# Altium PCB PCB.PcbDoc
Units mm, origin at the board's own origin, x right, y up, seen from the top; angles counter-clockwise.
Board outline 63.5 x 38.1 mm, 2 copper layers (Top Layer, Bottom Layer); 30 components, 23 nets, 90 pads, 23 vias.
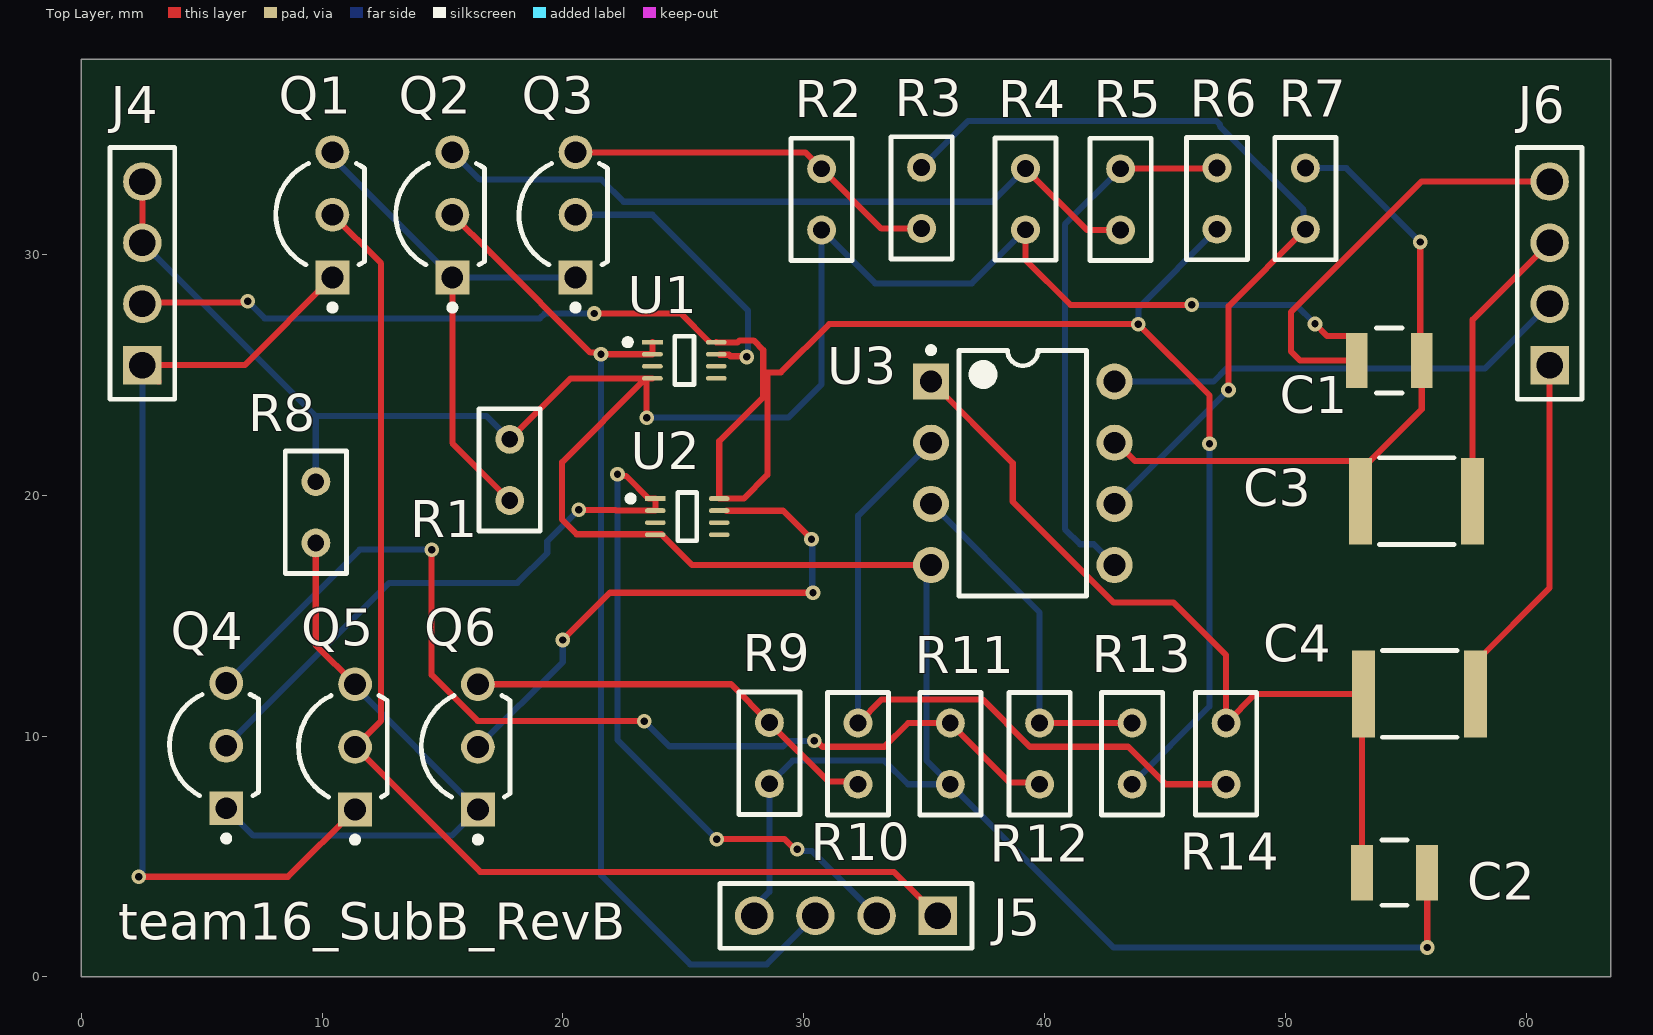
[diagram p0: Top Layer view]
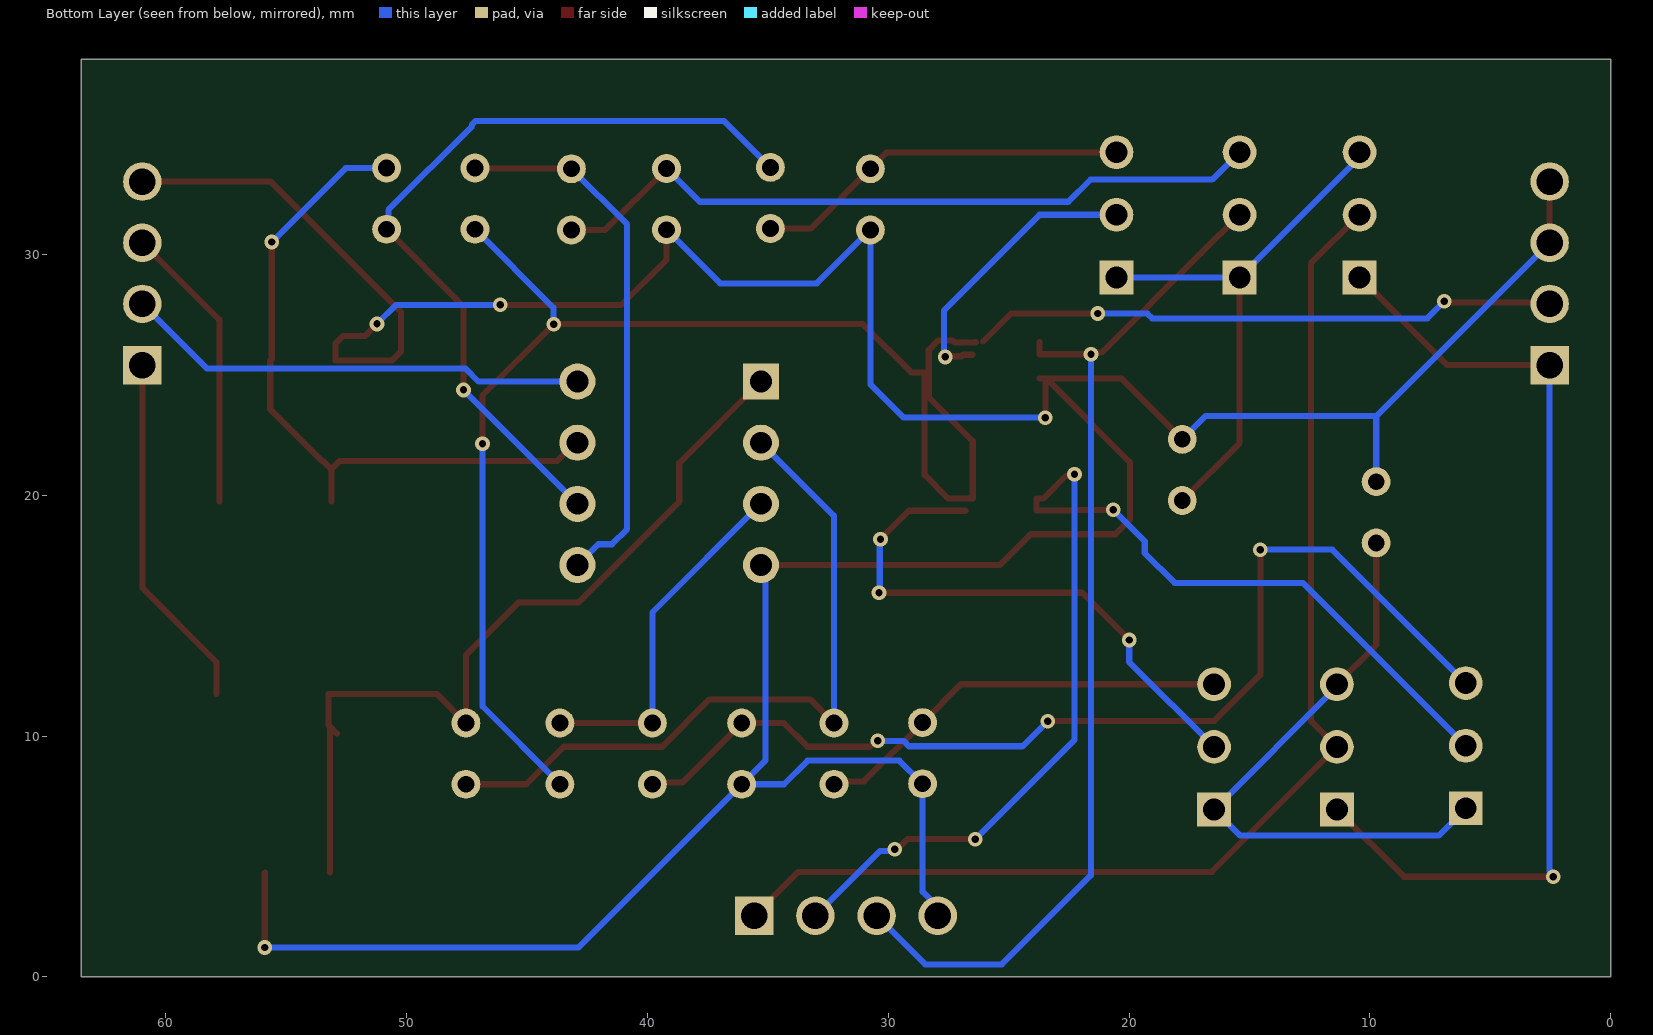
[diagram p1: Bottom Layer view, seen from below]
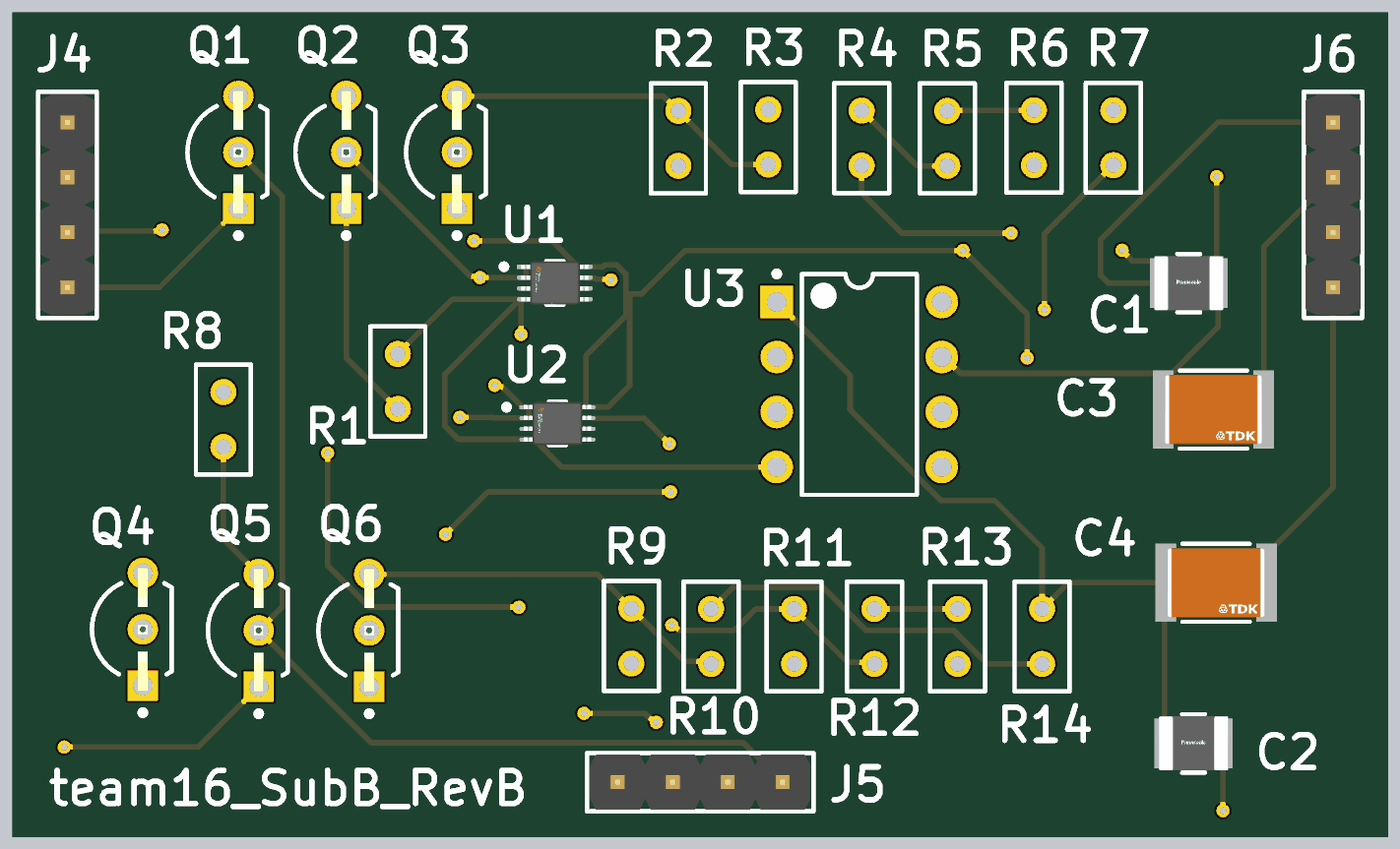
[diagram p2: 3D render of the assembled board from above, using the file's embedded part models]

## Layer stack, top to bottom
Top Solder: solder mask 0.0102, Solder Resist, Dk 3.5
Top Layer: signal copper 0.0356
Dielectric 1: dielectric 0.32, FR-4, Dk 4.8
Bottom Layer: signal copper 0.0356
Bottom Solder: solder mask 0.0102, Solder Resist, Dk 3.5

## Board outline
0,0 0,38.1 63.5,38.1 63.5,0

## Design rules (kind name [scope] priority, off if disabled: settings)
Clearance [All] p1: gap=0.254 ignorepadtopadclearanceinfootprint=FALSE except(0: Arc-Hole Track-Hole SMDPad-Hole THPad-Hole Via-Hole Fill-Hole Poly-Hole Region-Hole Text-Hole)
HoleSize [All] p1: absolutevalues=TRUE maxlimit=22.86 minlimit=0.305 maxpercent=80.000 minpercent=20.000
MinimumSolderMaskSliver [All] p1: minsoldermaskwidth=0.025
PolygonConnect [All] p1: connectstyle=Relief reliefconductorwidth=0.254 reliefentries=4 polygonreliefangle="90 Angle" airgapwidth=0.254
RoutingVias [All] p1: holewidth=0.305 width=0.61 viastyle="Through Hole" minholewidth=0.305 minwidth=0.61 maxholewidth=2.54 maxwidth=5.08
SilkToSilkClearance [All] p1: silktosilkclearance=0
SilkToSolderMaskClearance [IsPad] p1: minsilkscreentomaskgap=0.025 clearancetoexposedcopper=TRUE
SolderMaskExpansion [All] p1: expansion=0.102 istentingtop=FALSE
Width [All] p1: maxlimit=5.08 minlimit=0.254 preferedwidth=0.254
26 further rules are at their usual default settings.

## Components (designator, comment, footprint, x,y, rotation, side; value= is the part's Value field where it differs from the comment)
C1 "ECHU1C104GX5" FP-ECHUG3-MFG 54.3,25.59 r0 top
C2 "ECHU1C104GX5" FP-ECHUG3-MFG 54.52,4.33 r0 top
C3 "C4532X7R1C685K200KM" FP-C4532-200-0_4-IPC_B 55.44,19.75 r0 top
C4 "C4532X7R1C685K200KM" FP-C4532-200-0_4-IPC_B 55.56,11.75 r0 top
J4 "IF" 61300411121 2.54,29.21 r90 top
J5 "LO" 61300411121 31.75,2.54 r180 top
J6 "OUT" 61300411121 60.96,29.21 r90 top
Q1 "BS170ZL1G" ONSC-TO-92-3-29-11_AM_BL 10.43,31.64 r90 top
Q2 "BS170ZL1G" ONSC-TO-92-3-29-11_AM_BL 15.41,31.64 r90 top
Q3 "BS170ZL1G" ONSC-TO-92-3-29-11_AM_BL 20.52,31.64 r90 top
Q4 "BS170ZL1G" ONSC-TO-92-3-29-11_AM_BL 6.02,9.6 r90 top
Q5 "BS170ZL1G" ONSC-TO-92-3-29-11_AM_BL 11.37,9.55 r90 top
Q6 "BS170ZL1G" ONSC-TO-92-3-29-11_AM_BL 16.47,9.55 r90 top
R1 "Res1" RAD-0.1 17.79,21.05 r90 top value=100
R2 "Res1" RAD-0.1 30.74,32.28 r90 top value=1
R3 "Res1" RAD-0.1 34.89,32.34 r90 top value=100
R4 "Res1" RAD-0.1 39.2,32.29 r90 top value=1
R5 "Res1" RAD-0.1 43.15,32.28 r90 top value=100
R6 "Res1" RAD-0.1 47.15,32.31 r90 top value=6800
R7 "Res1" RAD-0.1 50.82,32.31 r90 top value=6800
R8 "Res1" RAD-0.1 9.74,19.29 r90 top value=100
R9 "Res1" RAD-0.1 28.57,9.29 r90 top value=1
R10 "Res1" RAD-0.1 32.25,9.27 r90 top value=100
R11 "Res1" RAD-0.1 36.08,9.27 r90 top value=1
R12 "Res1" RAD-0.1 39.79,9.27 r90 top value=100
R13 "Res1" RAD-0.1 43.63,9.27 r90 top value=6800
R14 "Res1" RAD-0.1 47.53,9.27 r90 top value=6800
U1 "SN74LVC2G00DCUR" FP-DCU0008A-IPC_C 25.04,25.6 r0 top
U2 "SN74LVC2G00DCUR" FP-DCU0008A-IPC_C 25.16,19.11 r0 top
U3 "TLV2462CP" P0008A 39.09,20.91 r0 top

## Footprints (in the part's own frame and the unit in brackets; to place one, negate y for a bottom-side part, rotate by r counter-clockwise, add the part's x,y. Pads: shape width x height; smd on the part's side, far side on the other; paste and mask are expansions set on the pad)
61300411121 [mm] "Pin Header, pitch 2.54 mm, THT, Vertical, single row, 4p"
  rect 1.6x1.6 hole 1.1: 1(-3.81,0)
  round 1.6 hole 1.1: 2(-1.27,0) 3(1.27,0) 4(3.81,0)
  silkscreen extent -5.23,-1.35 5.23,1.35, body extent -5.08,-1.27 5.08,1.27, height 8.57
FP-C4532-200-0_4-IPC_B [mm]
  rect 0.953x3.603 smd paste+0 mask+0: 1(-2.325,0) 2(2.325,0)
  silkscreen extent -1.55,-1.8 1.55,1.8, body extent -3.05,-2.05 3.05,2.05, height 0.25
FP-DCU0008A-IPC_C [mm]
  rect 0.86x0.197 smd paste+0 mask+0: 1(-1.326,0.75)
  rrect100% 0.86x0.197 smd paste+0 mask+0: 2(-1.326,0.25) 3(-1.326,-0.25) 4(-1.326,-0.75) 5(1.326,-0.75) 6(1.326,-0.25) 7(1.326,0.25) 8(1.326,0.75)
  silkscreen extent -2.47,-1 0.4,1, body extent -1.86,-1.1 1.86,1.1, height 0.25
FP-ECHUG3-MFG [mm]
  rect 0.9x2.3 smd paste+0 mask+0: 1(-1.35,0) 2(1.35,0)
  silkscreen extent -0.53,-1.35 0.53,1.35, body extent -1.9,-1.45 1.9,1.45, height 0.25
ONSC-TO-92-3-29-11_AM_BL [mm] "TO, 3-Leads, Body Dia 4.7mm, Pitch 2.6mm"
  rect 1.4x1.4 hole 0.9: 1(-2.6,0)
  round 1.4 hole 0.9: 2(0,0) 3(2.6,0)
  silkscreen extent -3.97,-1.34 2.13,2.35, body extent -2.84,-1.34 2.84,2.35, height 5.33
P0008A [mm] "DIP, 8-Leads, Body 10.15x6.6mm, Pitch 2.54mm"
  rect 1.5x1.5 hole 0.9: 1(-3.81,3.81)
  round 1.5 hole 0.9: 2(-3.81,1.27) 3(-3.81,-1.27) 4(-3.81,-3.81) 5(3.81,-3.81) 6(3.81,-1.27) 7(3.81,1.27) 8(3.81,3.81)
  silkscreen extent -3.93,-5.1 2.65,5.23, body extent -3.95,-5.07 3.95,5.07, height 5.08
RAD-0.1 [mm] "Radial Cap, Thru-Hole; 2 Leads; 0.1 in Pin Spacing"
  round 1.2 hole 0.7: 1(-1.27,0) 2(1.27,0)
  silkscreen extent -2.54,-1.27 2.54,1.27

## Part data
C1 C2: library part CMP-05434-000004-1, "CAP FILM 0.1UF 2% 16VDC 1210", Capacitance=100nF, Case Code (Imperial)=1210, Case Code (Metric)=3225, Dielectric=PPS, Dielectric Material=Polyphenylene, Insulation Resistance=3GR, Max Operating Temperature=125°C, Min Operating Temperature=-55°C, Package Quantity=1, Tolerance=2%, Voltage=16V, Case/Package=1210, Construction=Flat, Contact Plating=Copper, Depth=2.5mm, Dissipation Factor=0.6%, Height=2.1mm, Height - Seated (Max)=0.091inch, Lead Free="Lead Free", Length=3.2mm, Life (Hours)=500Hour, Mount="Surface Mount", Number of Pins=2, Packaging="Tape and Reel", Radiation Hardening=No, REACH SVHC="No SVHC", RoHS Compliant=Yes, Series=ECHU(X), Termination=SMD/SMT, Voltage Rating=16V, Voltage Rating (DC)=16V, Width=2.5mm
C3 C4: library part CMP-08246-005601-1, "Multilayer Ceramic Capacitors 6.8uF ±10% 16V X7R SMD 1812", Capacitance=6.8uF, Case Code (Imperial)=1812, Case Code (Metric)=4532, Dielectric=X7R, Max Operating Temperature=125°C, Min Operating Temperature=-55°C, Package Quantity=1000, Resistor Type=Ceramic, Tolerance=10%, Voltage Rating=16V, Case/Package=1812, Depth=3.2mm, Height=2mm, Lead Free="Lead Free", Length=0.177inch, Mount="Surface Mount", Number of Pins=2, Packaging="Tape and Reel", RoHS Compliant=Yes, Series=C, Termination=SMD/SMT, Thickness=0.087inch, Voltage Rating (DC)=16V, Weight=0.000952oz, Width=0.126inch
J4 J5 J6: library part CMP-1502-01064-1, "THT Vertical Pin Header WR-PHD, Pitch 2.54 mm, Single Row, 4 pins", Contact Resistance=20mOhm, Manufacturer="Wurth Elektronik", Operating Temperature=-40to105degC, Package Reference=61300411121, Rated Current=3A, Withstanding Voltage=500VAC, Working Voltage=250VAC, Datasheet URL=https://katalog.we-online.de/em/datasheet/6130xx11121.pdf, Gender=Male, Manufacturer URL=http://www.we-online.de, Mounting Technology=THT, Orientation=Vertical, Packaging=Bag, Part Number=61300411121, Pin Number=4, Pitch=2.54mm, Publisher=WurthElektronik, Row Number=Single
Q1 Q2 Q3 Q4 Q5 Q6: library part CMP-1058-00939-1, "Small Signal MOSFET, 500 mA, 60 V, N-Channel, 3-Pin TO-92, Pb-Free, Tape and Reel", Manufacturer="On Semiconductor", Package Type=TO-92, Channel Polarity="N Channel", ComponentLink1Description="Manufacturer URL", ComponentLink1URL=http://www.onsemi.com/, ComponentLink2Description=Datasheet, ComponentLink2URL=http://www.onsemi.com/pub_link/Collateral/BS170-D.PDF, ComponentLink3Description="Package Specification", ComponentLink3URL=http://www.onsemi.com/pub_link/Collateral/MAC97-D.PDF, Configuration=Single, DatasheetVersion="Rev. 6", ID Max (A)=0.5, Mounting Technology="Through Hole", PackageDescription="3-Pin Transistor Outline, Body 4.825 x 3.685 mm, Pitch 1.27 mm", PackageReference=TO-92-3-29-11_AM_BL, PackageVersion="Rev. AM", Packing="Tape and Reel", PartNumber=BS170ZL1G, PD Max (W)=0.35, RoHS=Pb-Free, V(BR)DSS Min (V)=60, VGS Max (V)=20, VGS(th) Max (V)=3
R1 R2 R3 R4 R5 R6 R7 R8 R9 R10 R11 R12 R13 R14: "Resistor", LatestRevisionDate=17-Jul-2002, LatestRevisionNote="Re-released for DXP Platform.", PackageDescription="Axial Device, Thru-Hole; 2 Leads; 0.3 in Pin Spacing", PackageReference=AXIAL-0.3, Published=8-Jun-2000, Publisher="Altium Limited"
U1 U2: library part CMP-0859-00705-4, "IC GATE NAND 2CH 2-INP US8", Case/Package=VSSOP, High Level Output Current=-32mA, Low Level Output Current=32mA, Max Operating Temperature=125°C, Max Supply Voltage=5.5V, Min Operating Temperature=-40°C, Min Supply Voltage=1.65V, Package Quantity=1, Quiescent Current=10uA, Contact Plating=Gold, Lead Free="Lead Free", Logic Function="NAND GATE", Max Output Current=32mA, Mount="Surface Mount", Number of Bits=2, Number of Circuits=2, Number of Elements=2, Number of Gates=2, Number of Input Lines=2, Number of Inputs=2, Number of Output Lines=1, Number of Outputs=1, Number of Pins=8, Output Current=32mA, Packaging="Tape and Reel", Propagation Delay=3.3ns, Radiation Hardening=No, REACH SVHC="No SVHC", RoHS Compliant=Yes, Termination=SMD/SMT, Turn-On Delay Time=3.3ns, Weight=0.000339oz
U3: library part CMP-0272-01601-3, "Dual Low-Power, Rail-to-Rail Input / Output Operational Amplifier, 2.7 to 6 V, 0 to 70 degC, 8-pin DIP (P8), Pb-Free (RoHS)", Manufacturer="Texas Instruments", Total Supply Voltage(Max)(+5V is 5, +/-5V is 10)=6, Total Supply Voltage(Min)(+5V is 5, +/-5V is 10)=2.7, CMRR(Min)(dB)=66, Code_JEDEC=MS-001, ComponentLink1Description="Manufacturer URL", ComponentLink1URL=http://www.ti.com/, ComponentLink2Description=Datasheet, ComponentLink2URL=http://www.ti.com/general/docs/lit/getliterature.tsp?genericPartNumber=TLV2462&fileType=pdf, ComponentLink3Description="Package Specification", ComponentLink3URL=http://www.ti.com/litv/pdf/mpdi001b, DatasheetVersion=SLOS220J, Eco-Plan="Pb-Free (RoHS)", IIB(Max)(pA)=14000, Iq per channel(Max)(mA)=0.575, Mounting Technology="Through Hole", Number of Channels=2, Offset Drift(Typ)(uV/C)=2, PackageDescription="8-Pin Plastic In-Line, Body 9.59 x 6.35 mm, Pitch 2.54 mm", PackageReference=P0008A, PackageVersion="4040082/E, 04/2010", PartNumber=TLV2462CP, Slew Rate(Typ)(V/us)=1.6, Sub Family="High Output Current Amplifier (>=50mA), Low Supply Voltage Amplifier (<=2.7V), Precision Amplifier", Vio (25C)(Max)(mV)=2, Vn at 1kHz(Typ)(nV/rtHz)=11

## Via types
v1: diameter 0.61, hole 0.305, Top Layer to Bottom Layer, 23 vias

## Nets (pads, with @x,y where several pads share a name; then routed paths per layer and width w, separated by ;. In a path a pad name is that pad's centre, name@x,y a point inside that pad or via, vN(x,y) a via of type N, cw(c..) or ccw(c..) an arc to the next point about the centre after c; other vN are vias at no path point)
3.3V: J4.2 R6.1 R13.1 U1.8 U2.8 | length 83.3
  Top Layer w0.254: J4.2 2.595,27.995 6.855,27.995 v1(6.91,28.05) ; v1(21.3,27.54) 24.901,27.54 U1.8@26.063,26.379 ; U1.8 26.371,26.345 27.251,26.345 27.332,26.426 27.914,26.426 28.316,26.024 28.316,24.072 26.486,22.243 U2.8 27.51,19.86 28.49,20.84 28.49,25.1 29.049,25.1 31.049,27.1 v1(43.88,27.1) 46.84,24.14 v1(46.84,22.13)
  Bottom Layer w0.254: v1(6.91,28.05) 7.62,27.34 19.042,27.34 19.242,27.54 v1(21.3,27.54) ; R13.1 43.63,8.027 46.84,11.237 v1(46.84,22.13) ; v1(43.88,27.1) 43.896,27.116 43.896,27.786 R6.1
5V: J6.2 U3.8 | length 19.4
  Bottom Layer w0.254: U3.8 47.01,24.72 47.55,25.26 58.28,25.26 J6.2
/TXEN: J5.1 Q1.2 Q5.2 | length 50.5
  Top Layer w0.254: Q1.2 12.451,29.619 12.451,10.631 Q5.2 16.56,4.36 33.74,4.36 J5.1
GND: C1.1 C2.2 J4.3 J4.4 J5.4 J6.4 R1.2 R2.1 R4.1 R8.2 R9.1 R11.1 U1.4 U2.4 U3.4 | length 164.5
  Top Layer w0.254: J4.3 J4.4 ; R1.2 20.32,24.85 U1.4@23.44,24.85 ; v1(23.48,23.22) 23.47,23.23 23.47,24.821 U1.4@23.499,24.85 ; U1.4 U1.4@23.499,24.85 ; U3.4 25.369,17.1 24.088,18.381 20.569,18.381 19.964,18.986 19.964,21.375 U1.4@23.44,24.85 ; R4.1 39.2,29.77 41.07,27.9 v1(46.1,27.9) ; v1(51.22,27.11) 51.717,26.613 52.627,26.613 52.95,26.29 C1.1 50.6,25.59 50.22,25.97 50.22,27.6 55.64,33.02 J6.4 ; C2.2 55.88,4.32 v1(55.88,1.22) ; U1.4@23.44,24.85 U1.4@23.499,24.85
  Bottom Layer w0.254: J4.3 9.74,23.28 ; R8.2 9.74,23.28 ; R1.2 16.83,23.28 9.74,23.28 ; v1(23.48,23.22) 29.36,23.22 30.74,24.6 R2.1 32.96,28.79 36.97,28.79 R4.1 ; J5.4 27.94,2.904 28.57,3.534 R9.1 29.531,8.981 33.343,8.981 34.324,8 R11.1 ; U3.4 35.099,16.919 35.099,8.981 R11.1 ; v1(46.1,27.9) 50.43,27.9 v1(51.22,27.11) ; v1(55.88,1.22) 42.86,1.22 R11.1
IF_SIG: J4.1 Q1.1 Q5.1 | length 41.8
  Top Layer w0.254: v1(2.39,4.16) 8.58,4.16 Q5.1 ; J4.1@3.213,24.727 J4.1 6.79,25.4 Q1.1
  Bottom Layer w0.254: v1(2.39,4.16) 2.39,4.256 2.54,4.406 J4.1
LO_FI_0: J5.2 Q4.2 U2.1 U2.2 | length 49.5
  Top Layer w0.254: v1(20.65,19.39) 22.172,19.39 22.202,19.36 U2.2 U2.1 23.56,19.86 22.618,20.802 22.334,20.802 v1(22.266,20.87) ; v1(26.38,5.72) 29.204,5.72 29.624,5.3 v1(29.72,5.3)
  Bottom Layer w0.254: Q4.2 12.78,16.36 18.11,16.36 19.346,17.596 19.346,18.086 v1(20.65,19.39) ; v1(22.266,20.87) 22.266,9.834 v1(26.38,5.72) ; v1(29.72,5.3) 29.788,5.232 30.328,5.232 J5.2
LO_FI_90: J5.3 Q2.2 U1.1 U1.2 | length 44.1
  Top Layer w0.254: Q2.2 17.015,30.035 17.025,30.035 21.142,25.918 21.512,25.918 v1(21.58,25.85) U1.2 U1.1
  Bottom Layer w0.254: v1(21.58,25.85) 21.58,4.22 25.28,0.52 28.46,0.52 J5.3
NetC1_2: C1.2 C3.1 R7.2 U3.7 | length 28.6
  Top Layer w0.254: U3.7 42.989,22.18 43.744,21.425 52.765,21.425 C3.1@53.115,21.075 ; C3.1 C3.1@53.115,21.075 ; v1(55.59,30.51) 55.59,25.65 C1.2 55.65,23.57 53.505,21.425 53.465,21.425 C3.1@53.115,21.075
  Bottom Layer w0.254: R7.2 52.52,33.58 v1(55.59,30.51)
NetC2_1: C2.1 C4.1 R14.2 U3.1 | length 34.8
  Top Layer w0.254: U3.1 38.67,21.33 38.67,19.731 42.851,15.55 45.34,15.55 47.53,13.36 R14.2 48.74,11.75 C4.1 53.235,10.45 C4.1@53.17,10.385 ; C4.1@52.885,10.1 C4.1@53.17,10.385 ; C2.1 C4.1@53.17,10.385
NetQ1_3: Q1.3 Q2.1 Q3.1 R1.1 | length 22.6
  Top Layer w0.254: Q2.1 15.41,22.16 R1.1
  Bottom Layer w0.254: Q1.3 10.43,34.02 Q2.1 Q3.1
NetQ2_3: Q2.3 R4.2 R5.1 | length 30.2
  Top Layer w0.254: R4.2 41.75,31.01 R5.1
  Bottom Layer w0.254: Q2.3 16.55,33.1 21.6,33.1 22.52,32.18 37.82,32.18 R4.2
NetQ3_2: Q3.2 U1.7 | length 11.9
  Top Layer w0.254: U1.7@26.51,25.829 26.896,25.829 26.956,25.77 27.6,25.77 v1(27.63,25.74)
  Bottom Layer w0.254: Q3.2 23.71,31.64 27.68,27.67 27.68,25.79 v1(27.63,25.74)
NetQ3_3: Q3.3 R2.2 R3.1 | length 15.7
  Top Layer w0.254: Q3.3 20.533,34.227 30.063,34.227 R2.2 33.22,31.07 R3.1
NetQ4_1: Q4.1 Q5.3 Q6.1 R8.1 | length 25.2
  Top Layer w0.254: R8.1 9.74,13.78 Q5.3
  Bottom Layer w0.254: Q4.1 7.151,5.869 15.389,5.869 Q6.1 11.37,12.05 Q5.3
NetQ4_3: Q4.3 R11.2 R12.1 | length 44.1
  Top Layer w0.254: v1(14.55,17.74) 14.55,12.541 16.46,10.631 23.369,10.631 v1(23.38,10.62) ; v1(30.43,9.8) 30.526,9.8 30.767,9.559 33.343,9.559 34.324,10.54 R11.2 38.553,8.067 39.723,8.067 R12.1
  Bottom Layer w0.254: Q4.3 11.56,17.74 v1(14.55,17.74) ; v1(23.38,10.62) 24.421,9.579 29.138,9.579 29.359,9.8 v1(30.43,9.8)
NetQ6_2: Q6.2 U2.7 | length 23.4
  Top Layer w0.254: v1(19.99,13.99) 21.95,15.95 v1(30.38,15.95) ; U2.7@26.789,19.352 29.138,19.352 v1(30.32,18.17)
  Bottom Layer w0.254: Q6.2 19.99,13.07 v1(19.99,13.99) ; v1(30.32,18.17) 30.35,18.14 30.35,15.98 v1(30.38,15.95)
NetQ6_3: Q6.3 R9.2 R10.1 | length 17.5
  Top Layer w0.254: Q6.3 26.98,12.15 R9.2 31.013,8.117 32.133,8.117 R10.1
NetR3_2: R3.2 R7.1 U3.6 | length 33.7
  Top Layer w0.254: v1(47.63,24.37) 47.63,27.85 R7.1
  Bottom Layer w0.254: R3.2 36.82,35.54 47.121,35.54 47.27,35.391 47.27,35.32 50.745,31.845 50.745,31.115 R7.1 ; U3.6 v1(47.63,24.37)
NetR5_2: R5.2 R6.2 U3.5 | length 22.6
  Top Layer w0.254: R5.2 43.165,33.565 47.135,33.565 R6.2
  Bottom Layer w0.254: U3.5 42.036,17.964 41.466,17.964 40.84,18.59 40.84,31.24 R5.2
NetR10_2: R10.2 R14.1 U3.2 | length 30
  Top Layer w0.254: R10.2 33.231,11.521 37.422,11.521 39.384,9.559 43.458,9.559 45.017,8 R14.1
  Bottom Layer w0.254: R10.2 32.25,19.15 U3.2
NetR12_2: R12.2 R13.2 U3.3 | length 14.8
  Top Layer w0.254: R12.2 R13.2
  Bottom Layer w0.254: U3.3 39.79,15.13 R12.2
RX_I: C4.2 J6.1 | length 14.9
  Top Layer w0.254: C4.2 57.885,13.075 60.96,16.15 J6.1
RX_Q: C3.2 J6.3 | length 12.1
  Top Layer w0.254: C3.2 57.765,27.285 J6.3
pads on no net: U1.3 U1.5 U1.6 U2.3 U2.5 U2.6

## Silkscreen, mask and mechanical layers (free items; w line width, h text height)
Top Overlay:
  text "team16_SubB_RevB" at 1.534,1.548 h1.52
board outline:
  the board outline again, w0.254